# EAGLE board v1 (EAGLE 6.5.0)
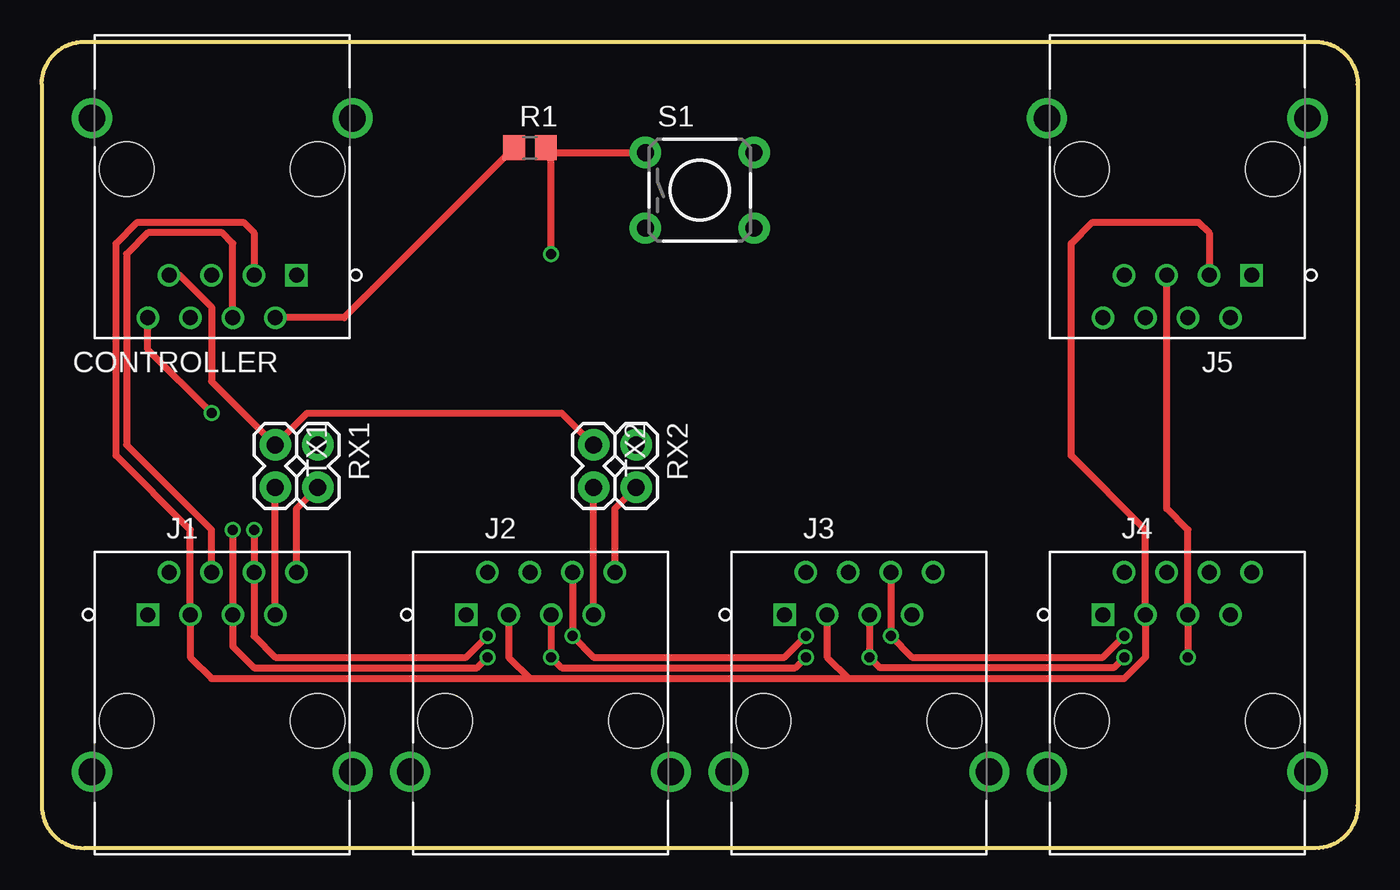
[diagram p0: board, top side]
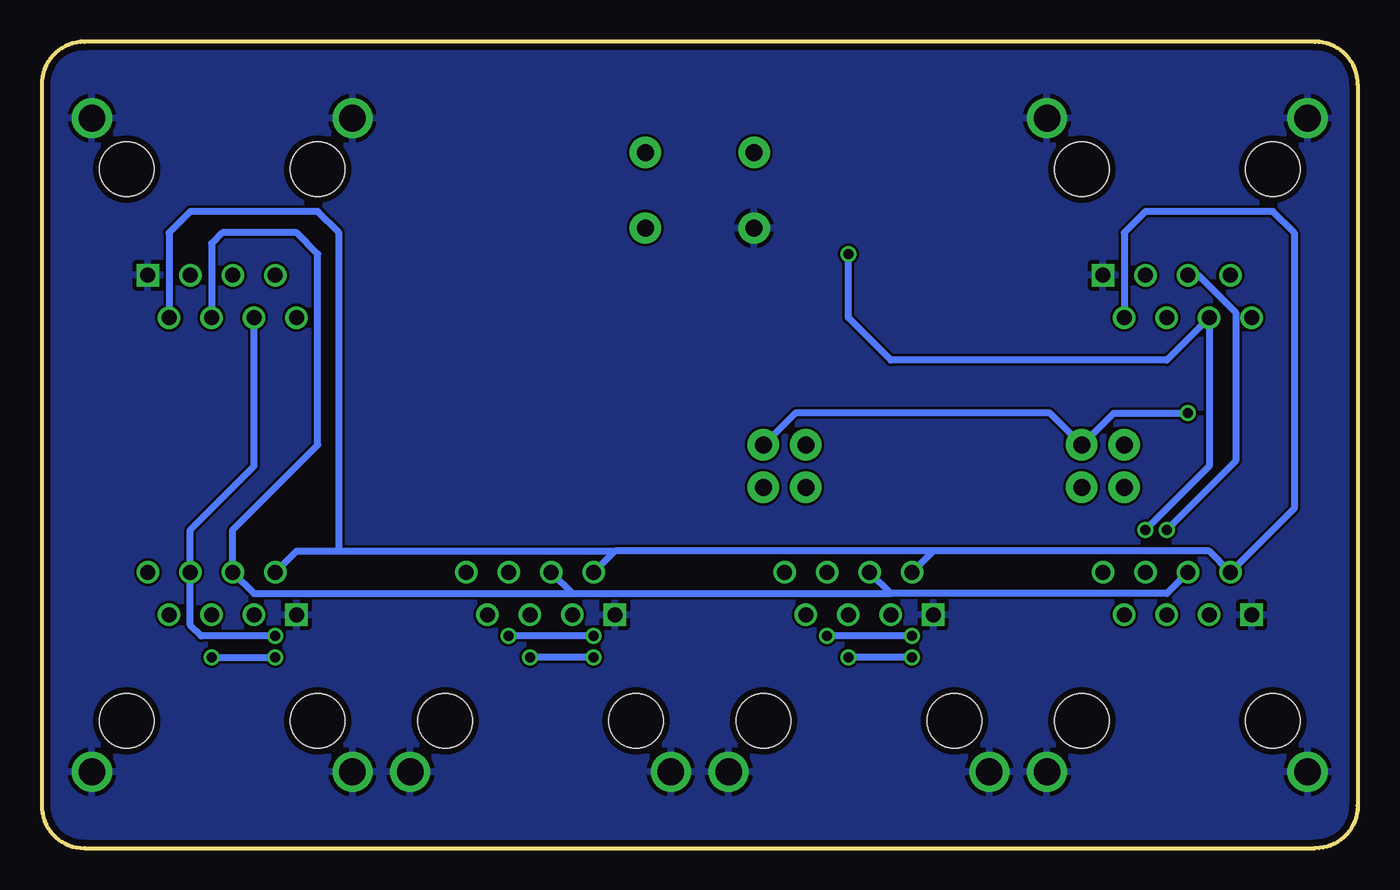
[diagram p1: board, bottom side, seen from below]

Size 78.74 x 48.26 mm. Coordinates in mm from the lower left corner, seen from the top.
Outline: 0,45.72 0,2.54 arc90 2.54,0 76.2,0 arc90 78.74,2.54 78.74,45.72 arc90 76.2,48.26 2.54,48.26 arc90 0,45.72
Copper layers (1*16): Top 0.0356mm / dielectric 1.5011mm / Bottom 0.0356mm
Design rules "LaenPCBOrder": minimum track width 6mil, minimum drill 13mil, track to track 6mil, track to pad 6mil, pad to pad 6mil, via to via 6mil, smd to smd 6mil, copper to edge 15mil, drill to drill 6mil, minimum pad ring 7mil, minimum via ring 7mil, stop-mask expansion 3mil, vias tented up to drill 0mil, thermal gap 10mil

## Footprints (pad centres in the part's own frame; a part is rotated, then mirrored left to right if it is on the bottom)
MOLEX_85504-5001 = drill 0.9 square: 1 0,0 | drill 0.9: 2 1.27,2.54; 3 2.54,0; 4 3.81,2.54; 5 5.08,0; 6 6.35,2.54; 7 7.62,0; 8 8.89,2.54 | drill 1.6: M1 -3.35,-9.4; M2 12.24,-9.4 | hole 3.25: -1.27,-6.35; 10.16,-6.35
R0805 = smd 1.3 x 1.5: 1 -0.95,0; 2 0.95,0
1X02 = drill 1.016 pad 1.88: 1 0,0; 2 2.54,0
TACTILE-PTH = drill 1.016 pad 1.88: 1 -3.251,2.261; 2 3.251,2.261; 3 -3.251,-2.261; 4 3.251,-2.261

## Placement (x,y rotation side)
CONTROLLER  85504-5001  [MOLEX_85504-5001]  15.24,34.29 180 top
J1  85504-5001  [MOLEX_85504-5001]  6.35,13.97 0 top
J2  85504-5001  [MOLEX_85504-5001]  25.4,13.97 0 top
J3  85504-5001  [MOLEX_85504-5001]  44.45,13.97 0 top
J4  85504-5001  [MOLEX_85504-5001]  63.5,13.97 0 top
J5  85504-5001  [MOLEX_85504-5001]  72.39,34.29 180 top
R1  [R0805]  29.21,41.91 0 top
RX1  M02PTH  [1X02]  16.51,24.13 270 top
RX2  M02PTH  [1X02]  35.56,24.13 270 top
S1  SWITCH-MOMENTARY-2PTH  [TACTILE-PTH]  39.37,39.37 0 top
TX1  M02PTH  [1X02]  13.97,24.13 270 top
TX2  M02PTH  [1X02]  33.02,24.13 270 top

## Library data of the parts
CONTROLLER J1-J5 = Molex-8550x-xxxx; MPN: 85504-5001; OC_FARNELL: 2313732; OC_NEWARK: 96W3689; PACKAGE: RJ45, JACK, 8P8C; SUPPLIER: MOLEX
R1 = rcl
RX1 RX2 TX1 TX2 = SparkFun-Connectors
S1 = SparkFun-Electromechanical

## Nets
3.3V: CONTROLLER.2 J1.2 J2.2 J3.2 J4.2 J5.2 R1.1
5V: CONTROLLER.5 J1.5 J2.5 J3.5 J4.5 J5.5
GND: CONTROLLER.1 CONTROLLER.M1 CONTROLLER.M2 J1.1 J1.M1 J1.M2 J2.1 J2.M1 J2.M2 J3.1 J3.M1 J3.M2 J4.1 J4.M1 J4.M2 J5.1 J5.M1 J5.M2 S1.3
RESET: CONTROLLER.6 J1.6 J2.6 J3.6 J4.6 J5.6 R1.2 S1.1
RX: CONTROLLER.8 RX1.1 RX2.1
RX1: J1.8 RX1.2
RX2: J2.8 RX2.2
SCL: CONTROLLER.4 J1.4 J2.4 J3.4 J4.4 J5.4
SDA: CONTROLLER.3 J1.3 J2.3 J3.3 J4.3 J5.3
TX: CONTROLLER.7 TX1.1 TX2.1
TX1: J1.7 TX1.2
TX2: J2.7 TX2.2

## Tracks (layer width: path | path; a pad name or v marks a point on that pad's centre or on a via)
3.3V  (via drill 0.6)
  Top 0.406: R1.1 18.1,31.75 CONTROLLER.2
  Bottom 0.406: 25.4,17.78 8.89,17.78 J1.2 3.81,20.32 3.81,36.83 5.08,38.1 12.7,38.1 13.97,36.83 CONTROLLER.2 | J2.2 25.4,17.78 | 25.4,17.78 44.45,17.78 | 44.45,17.78 J3.2 | 60.96,17.78 44.45,17.78 | J4.2 63.5,17.78 60.96,17.78 | 60.96,17.78 60.96,36.83 62.23,38.1 69.85,38.1 71.12,36.83 J5.2
  other vias: 64.77,16.51
5V  (via drill 0.6)
  Top 0.406: v26.67,11.43 26.04,10.79 12.7,10.79 11.43,12.06 J1.5 v11.43,19.05 | v45.72,11.43 45.09,10.79 31.11,10.79 v30.48,11.43 J2.5 | J3.5 v49.53,11.43 50.16,10.79 64.14,10.79 v64.77,11.43 | v68.58,11.43 J4.5 68.58,19.05 67.31,20.32 J5.5
  Bottom 0.406: v26.67,11.43 v30.48,11.43 | v45.72,11.43 v49.53,11.43 | v68.58,11.43 v64.77,11.43 | v11.43,19.05 7.3,23.18 7.3,32.07 9.53,34.29 CONTROLLER.5
GND
  pour Bottom: 0,48.26 78.74,48.26 78.74,0 0,0
RESET  (via drill 0.6)
  Top 0.406: v26.67,12.7 25.4,11.43 13.97,11.43 12.7,12.7 J1.6 v12.7,19.05 | v45.72,12.7 44.45,11.43 33.02,11.43 v31.75,12.7 J2.6 | J3.6 v50.8,12.7 52.07,11.43 63.5,11.43 v64.77,12.7 | v30.48,35.56 30.48,41.91 R1.2 30.16,41.63 S1.1
  Bottom 0.406: v26.67,12.7 v31.75,12.7 | v45.72,12.7 v50.8,12.7 | v12.7,19.05 8.89,22.86 CONTROLLER.6 11.43,29.21 27.94,29.21 30.48,31.75 v30.48,35.56 | v64.77,12.7 69.22,12.7 69.85,13.34 J4.6 69.85,19.05 66.04,22.86 J5.6
RX  (via drill 0.6)
  Top 0.406: v10.16,26.04 6.35,29.84 CONTROLLER.8
  Bottom 0.406: RX2.1 33.66,26.04 18.41,26.04 RX1.1 14.61,26.04 v10.16,26.04
RX1
  Top 0.406: J1.8 15.24,20.32 RX1.2
RX2
  Top 0.406: J2.8 34.29,20.32 RX2.2
SCL
  Top 0.406: J1.4 10.16,19.05 5.08,24.13 5.08,35.56 6.35,36.83 10.79,36.83 11.43,36.2 CONTROLLER.4
  Bottom 0.406: J1.4 11.43,15.24 27.94,15.24 | J2.4 27.94,15.24 | J3.4 46.99,15.24 | 46.99,15.24 27.94,15.24 | 46.99,15.24 66.04,15.24 J4.4 67.31,19.05 62.23,24.13 62.23,35.56 63.5,36.83 67.94,36.83 68.58,36.2 J5.4
SDA
  Top 0.406: 29.21,10.16 10.16,10.16 8.89,11.43 J1.3 8.89,19.05 4.45,23.5 4.45,36.2 5.71,37.47 12.06,37.47 12.7,36.83 CONTROLLER.3 | 29.21,10.16 48.26,10.16 | 48.26,10.16 64.77,10.16 66.04,11.43 J4.3 66.04,19.05 61.59,23.5 61.59,36.2 62.87,37.47 69.22,37.47 69.85,36.83 J5.3 | J2.3 27.94,11.43 29.21,10.16 | J3.3 46.99,11.43 48.26,10.16
TX
  Top 0.406: TX2.1 31.11,26.04 15.88,26.04 TX1.1 10.16,27.94 10.16,32.38 8.26,34.29 CONTROLLER.7
TX1
  Top 0.406: J1.7 TX1.2
TX2
  Top 0.406: J2.7 TX2.2